# Altium PCB RockRTK.PcbDoc (part 2 of 8)
Units mm, origin at the board's own origin, x right, y up, seen from the top; angles counter-clockwise.
Board outline 128 x 72 mm, 6 copper layers (Top Layer, MidLayer1GND, MidLayer2SIG, MidLayer3PWR, MidLayer4GND, Bottom Layer), stack 1.538 mm thick; 400 components, 307 nets, 1795 pads, 1243 vias.
Unrouted connection lines stored in the file: 522.
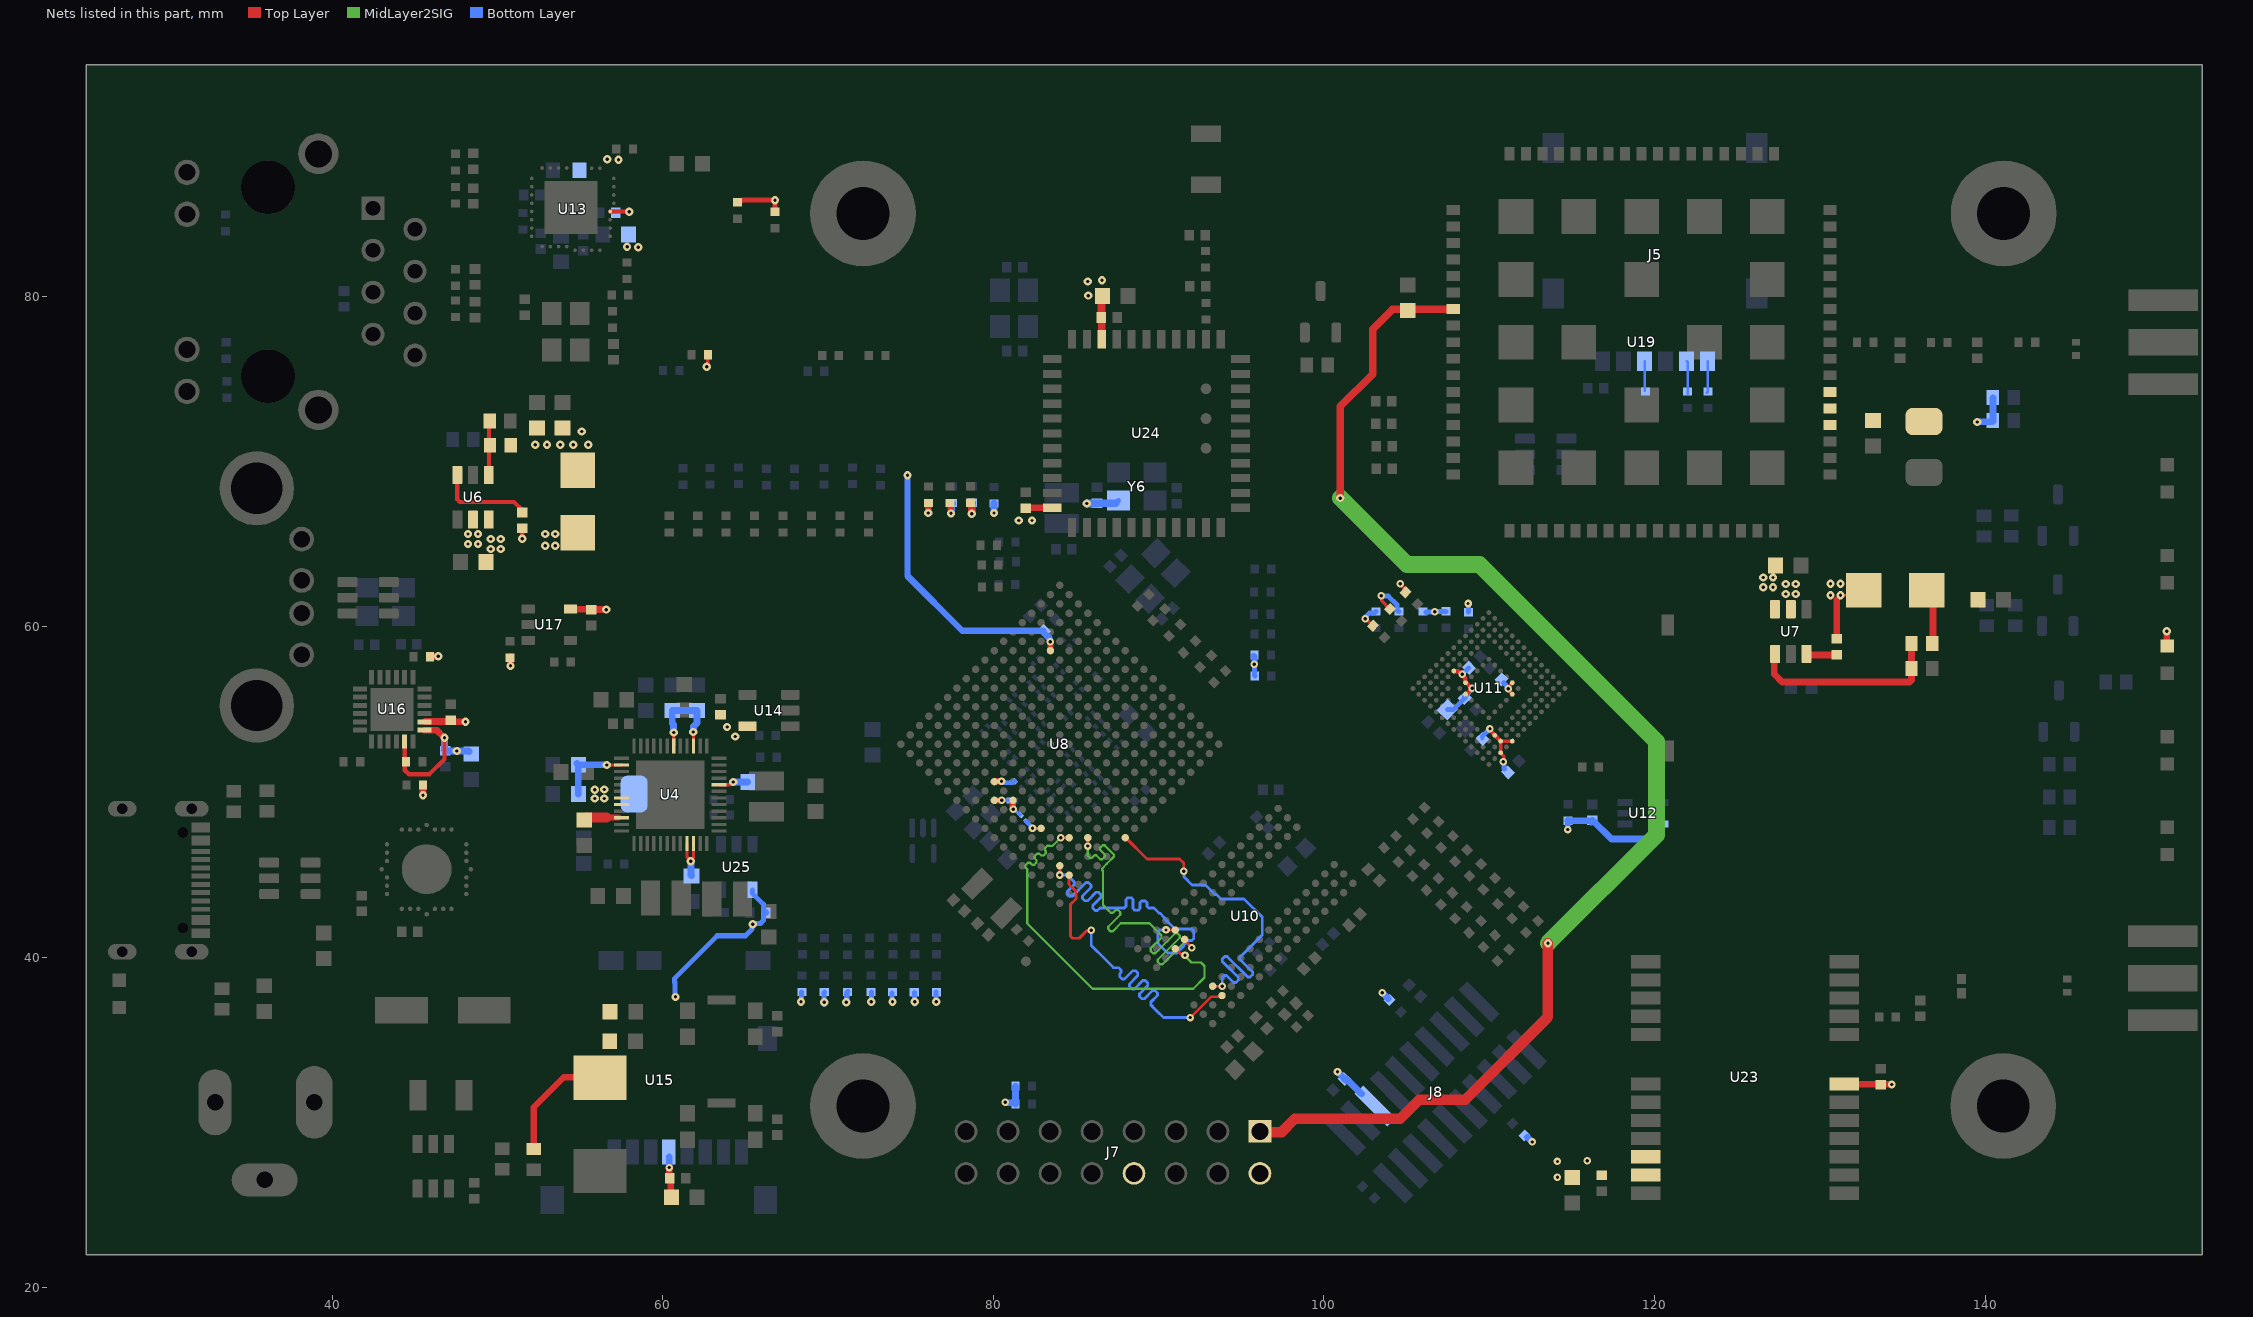
[diagram p6: the nets of this part, all layers, seen from the top]

## Footprints (in the part's own frame and the unit in brackets; to place one, negate y for a bottom-side part, rotate by r counter-clockwise, add the part's x,y. Pads: shape width x height; smd on the part's side, far side on the other; paste and mask are expansions set on the pad) (continued)
DBV0005A_L [mm] "SOT23, 5-Leads, Body 3.05x1.75mm, Pitch 0.95mm, IPC High Density"
  rrect18% 0.8x0.55 smd: 1(-1.275,0.95) 2(-1.275,0) 3(-1.275,-0.95) 4(1.275,-0.95) 5(1.275,0.95)
  silkscreen extent -1.4,-1.55 0.5,1.9, body extent -1.42,-1.46 1.42,1.46, height 1.08
DC005 [mm]
  oval 2.2x4.4 hole 1 square: 1(5.853,0.01)
  oval 2x4 hole 1 square: 2(-0.147,0.01)
  oval 4x2 hole 1 square: 3(2.853,-4.69)
  silkscreen extent -7.85,-4.49 7.6,4.51, body extent -7.9,-4.65 6.4,4.75, height 11
DSHP01TSGER [mil]
  rect 29.92x50 smd: 1(2,145) 2(2,-155)
  silkscreen extent -55,-111 59,192, body extent -48,-174 48,166, height 106
FB_0603 [mm]
  rect 0.85x0.95 smd: 1(-0.8,-0.05) 2(0.8,-0.05)
  silkscreen extent 0,-0.35 0,0.25, body extent -0.85,-0.5 0.85,0.4, height 0.9
FP-CP2102N-A02-GQFN28R-MFG [mm]
  round 0.27 smd paste+0 mask+0: 1(-2.4,1.5) 2(-2.4,1) 3(-2.4,0.5) 4(-2.725,0) 5(-2.4,-0.5) 6(-2.4,-1) 7(-2.4,-1.5) 8(-1.5,-2.4) 9(-1,-2.4) 10(-0.5,-2.4) 11(0,-2.725) 12(0.5,-2.4) 13(1,-2.4) 14(1.5,-2.4) 15(2.4,-1.5) 16(2.4,-1) 17(2.4,-0.5) 18(2.675,0) 19(2.4,0.5) 20(2.4,1) 21(2.4,1.5) 22(1.5,2.4) 23(1,2.4) 24(0.5,2.4) 25(0,2.675) 26(-0.5,2.4) 27(-1,2.4) 28(-1.5,2.4)
  round 3.015 smd paste-1000 mask+0: 29(0,0)
  Top Layer region: -1.35,2.875 -1.35,2.075 -1.361,2.018 -1.394,1.969 -1.443,1.936 -1.5,1.925 -1.5,1.925 -1.557,1.936 -1.606,1.969 -1.639,2.018 -1.65,2.075 -1.65,2.075 -1.65,2.875
  Top Layer region: -0.85,2.875 -0.85,2.075 -0.861,2.018 -0.894,1.969 -0.943,1.936 -1,1.925 -1,1.925 -1.057,1.936 -1.106,1.969 -1.139,2.018 -1.15,2.075 -1.15,2.075 -1.15,2.875
  Top Layer region: -0.35,2.875 -0.35,2.075 -0.361,2.018 -0.394,1.969 -0.443,1.936 -0.5,1.925 -0.5,1.925 -0.557,1.936 -0.606,1.969 -0.639,2.018 -0.65,2.075 -0.65,2.075 -0.65,2.875
  Top Layer region: 0.15,2.875 0.15,2.075 0.139,2.018 0.106,1.969 0.057,1.936 0,1.925 0,1.925 -0.057,1.936 -0.106,1.969 -0.139,2.018 -0.15,2.075 -0.15,2.075 -0.15,2.875
  Top Layer region: 0.65,2.875 0.65,2.075 0.639,2.018 0.606,1.969 0.557,1.936 0.5,1.925 0.5,1.925 0.443,1.936 0.394,1.969 0.361,2.018 0.35,2.075 0.35,2.075 0.35,2.875
  Top Layer region: 1.15,2.875 1.15,2.075 1.139,2.018 1.106,1.969 1.057,1.936 1,1.925 1,1.925 0.943,1.936 0.894,1.969 0.861,2.018 0.85,2.075 0.85,2.075 0.85,2.875
  Top Layer region: 1.65,2.875 1.65,2.075 1.639,2.018 1.606,1.969 1.557,1.936 1.5,1.925 1.5,1.925 1.443,1.936 1.394,1.969 1.361,2.018 1.35,2.075 1.35,2.075 1.35,2.875
  Top Layer region: 2.875,1.35 2.075,1.35 2.018,1.361 1.969,1.394 1.936,1.443 1.925,1.5 1.925,1.5 1.936,1.557 1.969,1.606 2.018,1.639 2.075,1.65 2.075,1.65 2.875,1.65
  Top Layer region: 2.875,0.85 2.075,0.85 2.018,0.861 1.969,0.894 1.936,0.943 1.925,1 1.925,1 1.936,1.057 1.969,1.106 2.018,1.139 2.075,1.15 2.075,1.15 2.875,1.15
  Top Layer region: 2.875,0.35 2.075,0.35 2.018,0.361 1.969,0.394 1.936,0.443 1.925,0.5 1.925,0.5 1.936,0.557 1.969,0.606 2.018,0.639 2.075,0.65 2.075,0.65 2.875,0.65
  Top Layer region: 2.875,-0.15 2.075,-0.15 2.018,-0.139 1.969,-0.106 1.936,-0.057 1.925,0 1.925,0 1.936,0.057 1.969,0.106 2.018,0.139 2.075,0.15 2.075,0.15 2.875,0.15
  Top Layer region: 2.875,-0.65 2.075,-0.65 2.018,-0.639 1.969,-0.606 1.936,-0.557 1.925,-0.5 1.925,-0.5 1.936,-0.443 1.969,-0.394 2.018,-0.361 2.075,-0.35 2.075,-0.35 2.875,-0.35
  Top Layer region: 2.875,-1.15 2.075,-1.15 2.018,-1.139 1.969,-1.106 1.936,-1.057 1.925,-1 1.925,-1 1.936,-0.943 1.969,-0.894 2.018,-0.861 2.075,-0.85 2.075,-0.85 2.875,-0.85
  Top Layer region: 2.875,-1.65 2.075,-1.65 2.018,-1.639 1.969,-1.606 1.936,-1.557 1.925,-1.5 1.925,-1.5 1.936,-1.443 1.969,-1.394 2.018,-1.361 2.075,-1.35 2.075,-1.35 2.875,-1.35
  Top Layer region: 1.35,-2.875 1.35,-2.075 1.361,-2.018 1.394,-1.969 1.443,-1.936 1.5,-1.925 1.5,-1.925 1.557,-1.936 1.606,-1.969 1.639,-2.018 1.65,-2.075 1.65,-2.075 1.65,-2.875
  Top Layer region: 0.85,-2.875 0.85,-2.075 0.861,-2.018 0.894,-1.969 0.943,-1.936 1,-1.925 1,-1.925 1.057,-1.936 1.106,-1.969 1.139,-2.018 1.15,-2.075 1.15,-2.075 1.15,-2.875
  Top Layer region: 0.35,-2.875 0.35,-2.075 0.361,-2.018 0.394,-1.969 0.443,-1.936 0.5,-1.925 0.5,-1.925 0.557,-1.936 0.606,-1.969 0.639,-2.018 0.65,-2.075 0.65,-2.075 0.65,-2.875
  Top Layer region: -0.15,-2.875 -0.15,-2.075 -0.139,-2.018 -0.106,-1.969 -0.057,-1.936 0,-1.925 0,-1.925 0.057,-1.936 0.106,-1.969 0.139,-2.018 0.15,-2.075 0.15,-2.075 0.15,-2.875
  Top Layer region: -0.65,-2.875 -0.65,-2.075 -0.639,-2.018 -0.606,-1.969 -0.557,-1.936 -0.5,-1.925 -0.5,-1.925 -0.443,-1.936 -0.394,-1.969 -0.361,-2.018 -0.35,-2.075 -0.35,-2.075 -0.35,-2.875
  Top Layer region: -1.15,-2.875 -1.15,-2.075 -1.139,-2.018 -1.106,-1.969 -1.057,-1.936 -1,-1.925 -1,-1.925 -0.943,-1.936 -0.894,-1.969 -0.861,-2.018 -0.85,-2.075 -0.85,-2.075 -0.85,-2.875
  Top Layer region: -1.65,-2.875 -1.65,-2.075 -1.639,-2.018 -1.606,-1.969 -1.557,-1.936 -1.5,-1.925 -1.5,-1.925 -1.443,-1.936 -1.394,-1.969 -1.361,-2.018 -1.35,-2.075 -1.35,-2.075 -1.35,-2.875
  Top Layer region: -2.875,-1.35 -2.075,-1.35 -2.018,-1.361 -1.969,-1.394 -1.936,-1.443 -1.925,-1.5 -1.925,-1.5 -1.936,-1.557 -1.969,-1.606 -2.018,-1.639 -2.075,-1.65 -2.075,-1.65 -2.875,-1.65
  Top Layer region: -2.875,-0.85 -2.075,-0.85 -2.018,-0.861 -1.969,-0.894 -1.936,-0.943 -1.925,-1 -1.925,-1 -1.936,-1.057 -1.969,-1.106 -2.018,-1.139 -2.075,-1.15 -2.075,-1.15 -2.875,-1.15
  Top Layer region: -2.875,-0.35 -2.075,-0.35 -2.018,-0.361 -1.969,-0.394 -1.936,-0.443 -1.925,-0.5 -1.925,-0.5 -1.936,-0.557 -1.969,-0.606 -2.018,-0.639 -2.075,-0.65 -2.075,-0.65 -2.875,-0.65
  Top Layer region: -2.875,0.15 -2.075,0.15 -2.018,0.139 -1.969,0.106 -1.936,0.057 -1.925,0 -1.925,0 -1.936,-0.057 -1.969,-0.106 -2.018,-0.139 -2.075,-0.15 -2.075,-0.15 -2.875,-0.15
  Top Layer region: -2.875,0.65 -2.075,0.65 -2.018,0.639 -1.969,0.606 -1.936,0.557 -1.925,0.5 -1.925,0.5 -1.936,0.443 -1.969,0.394 -2.018,0.361 -2.075,0.35 -2.075,0.35 -2.875,0.35
  Top Layer region: -2.875,1.15 -2.075,1.15 -2.018,1.139 -1.969,1.106 -1.936,1.057 -1.925,1 -1.925,1 -1.936,0.943 -1.969,0.894 -2.018,0.861 -2.075,0.85 -2.075,0.85 -2.875,0.85
  Top Layer region: -2.875,1.65 -2.075,1.65 -2.018,1.639 -1.969,1.606 -1.936,1.557 -1.925,1.5 -1.925,1.5 -1.936,1.443 -1.969,1.394 -2.018,1.361 -2.075,1.35 -2.075,1.35 -2.875,1.35
  Top Layer region: -1.325,1.675 1.675,1.675 1.675,-1.675 -1.675,-1.675 -1.675,1.325 -1.325,1.675
  silkscreen extent -3.55,-2.55 2.55,2.55, body extent -2.98,-2.98 2.98,2.98, height 0.25
FP-DBV0005A-MFG [mm]
  rrect17% 1.1x0.6 smd paste+0 mask+0: 1(-1.3,0.95) 2(-1.3,0) 3(-1.3,-0.95) 4(1.3,-0.95) 5(1.3,0.95)
  silkscreen extent -2.6,-1.53 0.87,1.52, body extent -1.95,-1.78 1.95,1.78, height 0.25
FP-DCK0005A-IPC_C [mm]
  rect 1.164x0.336 smd paste+0 mask+0: 1(-0.77,0.65)
  rrect100% 1.164x0.336 smd paste+0 mask+0: 2(-0.77,0) 3(-0.77,-0.65) 4(0.77,-0.65) 5(0.77,0.65)
  silkscreen extent -2.05,-1.25 1.05,1.25
FP-DCK0005A-MFG [mm]
  rect 0.9x0.4 smd paste-1000 mask+0: 1(-1.1,0.65) 2(-1.1,0) 3(-1.1,-0.65) 4(1.1,-0.65) 5(1.1,0.65)
  silkscreen extent -2.22,-1.07 0.7,1.08, body extent -1.1,-1 1.1,1, height 1.1
FP-DDC0006A-MFG [mm]
  rrect17% 1.1x0.6 smd paste+0 mask+0: 1(-1.35,0.95) 2(-1.35,0) 3(-1.35,-0.95) 4(1.35,-0.95) 5(1.35,0) 6(1.35,0.95)
  silkscreen extent -2.57,-1.53 0.43,1.53, body extent -2,-1.63 2,1.63, height 0.25
FP-KMR231GLFS-MFG [mm]
  rect 0.9x1 smd paste+0 mask+0: 1(-2.05,0.8) 2(2.05,0.8) 3(-2.05,-0.8) 4(2.05,-0.8)
  rect 1.7x0.55 smd paste+0 mask+0: 5(0,1.425)
  silkscreen extent -3.17,-1.4 2.1,1.68, body extent -2.6,-1.5 2.6,1.8, height 0.25
FP-LAN8710A-EZC-TR-MFG [mm]
  round 0.216 smd paste+0 mask+0: 1(-2.37,1.75) 2(-2.37,1.25) 3(-2.37,0.75) 4(-2.37,0.25) 5(-2.595,-0.25) 6(-2.595,-0.75) 7(-2.595,-1.25) 8(-2.595,-1.75) 9(-1.75,-2.37) 10(-1.25,-2.37) 11(-0.75,-2.37) 12(-0.25,-2.37) 13(0.25,-2.595) 14(0.75,-2.595) 15(1.25,-2.595) 16(1.75,-2.595) 17(2.37,-1.75) 18(2.37,-1.25) 19(2.37,-0.75) 20(2.37,-0.25) 21(2.382,0.25) 22(2.382,0.75) 23(2.382,1.25) 24(2.382,1.75) 25(1.75,2.37) 26(1.25,2.37) 27(0.75,2.37) 28(0.25,2.37) 29(-0.25,2.382) 30(-0.75,2.382) 31(-1.25,2.382) 32(-1.75,2.382)
  rect 3.2x3.2 smd paste+0 mask+0: 33(0,0)
  Top Layer region: -1.63,2.715 -1.63,2.145 -1.639,2.099 -1.665,2.06 -1.704,2.034 -1.75,2.025 -1.75,2.025 -1.796,2.034 -1.835,2.06 -1.861,2.099 -1.87,2.145 -1.87,2.145 -1.87,2.715
  Top Layer region: -1.13,2.715 -1.13,2.145 -1.139,2.099 -1.165,2.06 -1.204,2.034 -1.25,2.025 -1.25,2.025 -1.296,2.034 -1.335,2.06 -1.361,2.099 -1.37,2.145 -1.37,2.145 -1.37,2.715
  Top Layer region: -0.63,2.715 -0.63,2.145 -0.639,2.099 -0.665,2.06 -0.704,2.034 -0.75,2.025 -0.75,2.025 -0.796,2.034 -0.835,2.06 -0.861,2.099 -0.87,2.145 -0.87,2.145 -0.87,2.715
  Top Layer region: -0.13,2.715 -0.13,2.145 -0.139,2.099 -0.165,2.06 -0.204,2.034 -0.25,2.025 -0.25,2.025 -0.296,2.034 -0.335,2.06 -0.361,2.099 -0.37,2.145 -0.37,2.145 -0.37,2.715
  Top Layer region: 0.37,2.715 0.37,2.145 0.361,2.099 0.335,2.06 0.296,2.034 0.25,2.025 0.25,2.025 0.204,2.034 0.165,2.06 0.139,2.099 0.13,2.145 0.13,2.145 0.13,2.715
  Top Layer region: 0.87,2.715 0.87,2.145 0.861,2.099 0.835,2.06 0.796,2.034 0.75,2.025 0.75,2.025 0.704,2.034 0.665,2.06 0.639,2.099 0.63,2.145 0.63,2.145 0.63,2.715
  Top Layer region: 1.37,2.715 1.37,2.145 1.361,2.099 1.335,2.06 1.296,2.034 1.25,2.025 1.25,2.025 1.204,2.034 1.165,2.06 1.139,2.099 1.13,2.145 1.13,2.145 1.13,2.715
  Top Layer region: 1.87,2.715 1.87,2.145 1.861,2.099 1.835,2.06 1.796,2.034 1.75,2.025 1.75,2.025 1.704,2.034 1.665,2.06 1.639,2.099 1.63,2.145 1.63,2.145 1.63,2.715
  Top Layer region: 2.715,1.63 2.145,1.63 2.099,1.639 2.06,1.665 2.034,1.704 2.025,1.75 2.025,1.75 2.034,1.796 2.06,1.835 2.099,1.861 2.145,1.87 2.145,1.87 2.715,1.87
  Top Layer region: 2.715,1.13 2.145,1.13 2.099,1.139 2.06,1.165 2.034,1.204 2.025,1.25 2.025,1.25 2.034,1.296 2.06,1.335 2.099,1.361 2.145,1.37 2.145,1.37 2.715,1.37
  Top Layer region: 2.715,0.63 2.145,0.63 2.099,0.639 2.06,0.665 2.034,0.704 2.025,0.75 2.025,0.75 2.034,0.796 2.06,0.835 2.099,0.861 2.145,0.87 2.145,0.87 2.715,0.87
  Top Layer region: 2.715,0.13 2.145,0.13 2.099,0.139 2.06,0.165 2.034,0.204 2.025,0.25 2.025,0.25 2.034,0.296 2.06,0.335 2.099,0.361 2.145,0.37 2.145,0.37 2.715,0.37
  Top Layer region: 2.715,-0.37 2.145,-0.37 2.099,-0.361 2.06,-0.335 2.034,-0.296 2.025,-0.25 2.025,-0.25 2.034,-0.204 2.06,-0.165 2.099,-0.139 2.145,-0.13 2.145,-0.13 2.715,-0.13
  Top Layer region: 2.715,-0.87 2.145,-0.87 2.099,-0.861 2.06,-0.835 2.034,-0.796 2.025,-0.75 2.025,-0.75 2.034,-0.704 2.06,-0.665 2.099,-0.639 2.145,-0.63 2.145,-0.63 2.715,-0.63
  Top Layer region: 2.715,-1.37 2.145,-1.37 2.099,-1.361 2.06,-1.335 2.034,-1.296 2.025,-1.25 2.025,-1.25 2.034,-1.204 2.06,-1.165 2.099,-1.139 2.145,-1.13 2.145,-1.13 2.715,-1.13
  Top Layer region: 2.715,-1.87 2.145,-1.87 2.099,-1.861 2.06,-1.835 2.034,-1.796 2.025,-1.75 2.025,-1.75 2.034,-1.704 2.06,-1.665 2.099,-1.639 2.145,-1.63 2.145,-1.63 2.715,-1.63
  Top Layer region: 1.63,-2.715 1.63,-2.145 1.639,-2.099 1.665,-2.06 1.704,-2.034 1.75,-2.025 1.75,-2.025 1.796,-2.034 1.835,-2.06 1.861,-2.099 1.87,-2.145 1.87,-2.145 1.87,-2.715
  Top Layer region: 1.13,-2.715 1.13,-2.145 1.139,-2.099 1.165,-2.06 1.204,-2.034 1.25,-2.025 1.25,-2.025 1.296,-2.034 1.335,-2.06 1.361,-2.099 1.37,-2.145 1.37,-2.145 1.37,-2.715
  Top Layer region: 0.63,-2.715 0.63,-2.145 0.639,-2.099 0.665,-2.06 0.704,-2.034 0.75,-2.025 0.75,-2.025 0.796,-2.034 0.835,-2.06 0.861,-2.099 0.87,-2.145 0.87,-2.145 0.87,-2.715
  Top Layer region: 0.13,-2.715 0.13,-2.145 0.139,-2.099 0.165,-2.06 0.204,-2.034 0.25,-2.025 0.25,-2.025 0.296,-2.034 0.335,-2.06 0.361,-2.099 0.37,-2.145 0.37,-2.145 0.37,-2.715
  Top Layer region: -0.37,-2.715 -0.37,-2.145 -0.361,-2.099 -0.335,-2.06 -0.296,-2.034 -0.25,-2.025 -0.25,-2.025 -0.204,-2.034 -0.165,-2.06 -0.139,-2.099 -0.13,-2.145 -0.13,-2.145 -0.13,-2.715
  Top Layer region: -0.87,-2.715 -0.87,-2.145 -0.861,-2.099 -0.835,-2.06 -0.796,-2.034 -0.75,-2.025 -0.75,-2.025 -0.704,-2.034 -0.665,-2.06 -0.639,-2.099 -0.63,-2.145 -0.63,-2.145 -0.63,-2.715
  Top Layer region: -1.37,-2.715 -1.37,-2.145 -1.361,-2.099 -1.335,-2.06 -1.296,-2.034 -1.25,-2.025 -1.25,-2.025 -1.204,-2.034 -1.165,-2.06 -1.139,-2.099 -1.13,-2.145 -1.13,-2.145 -1.13,-2.715
  Top Layer region: -1.87,-2.715 -1.87,-2.145 -1.861,-2.099 -1.835,-2.06 -1.796,-2.034 -1.75,-2.025 -1.75,-2.025 -1.704,-2.034 -1.665,-2.06 -1.639,-2.099 -1.63,-2.145 -1.63,-2.145 -1.63,-2.715
  Top Layer region: -2.715,-1.63 -2.145,-1.63 -2.099,-1.639 -2.06,-1.665 -2.034,-1.704 -2.025,-1.75 -2.025,-1.75 -2.034,-1.796 -2.06,-1.835 -2.099,-1.861 -2.145,-1.87 -2.145,-1.87 -2.715,-1.87
  Top Layer region: -2.715,-1.13 -2.145,-1.13 -2.099,-1.139 -2.06,-1.165 -2.034,-1.204 -2.025,-1.25 -2.025,-1.25 -2.034,-1.296 -2.06,-1.335 -2.099,-1.361 -2.145,-1.37 -2.145,-1.37 -2.715,-1.37
  Top Layer region: -2.715,-0.63 -2.145,-0.63 -2.099,-0.639 -2.06,-0.665 -2.034,-0.704 -2.025,-0.75 -2.025,-0.75 -2.034,-0.796 -2.06,-0.835 -2.099,-0.861 -2.145,-0.87 -2.145,-0.87 -2.715,-0.87
  Top Layer region: -2.715,-0.13 -2.145,-0.13 -2.099,-0.139 -2.06,-0.165 -2.034,-0.204 -2.025,-0.25 -2.025,-0.25 -2.034,-0.296 -2.06,-0.335 -2.099,-0.361 -2.145,-0.37 -2.145,-0.37 -2.715,-0.37
  Top Layer region: -2.715,0.37 -2.145,0.37 -2.099,0.361 -2.06,0.335 -2.034,0.296 -2.025,0.25 -2.025,0.25 -2.034,0.204 -2.06,0.165 -2.099,0.139 -2.145,0.13 -2.145,0.13 -2.715,0.13
  Top Layer region: -2.715,0.87 -2.145,0.87 -2.099,0.861 -2.06,0.835 -2.034,0.796 -2.025,0.75 -2.025,0.75 -2.034,0.704 -2.06,0.665 -2.099,0.639 -2.145,0.63 -2.145,0.63 -2.715,0.63
  Top Layer region: -2.715,1.37 -2.145,1.37 -2.099,1.361 -2.06,1.335 -2.034,1.296 -2.025,1.25 -2.025,1.25 -2.034,1.204 -2.06,1.165 -2.099,1.139 -2.145,1.13 -2.145,1.13 -2.715,1.13
  Top Layer region: -2.715,1.87 -2.145,1.87 -2.099,1.861 -2.06,1.835 -2.034,1.796 -2.025,1.75 -2.025,1.75 -2.034,1.704 -2.06,1.665 -2.099,1.639 -2.145,1.63 -2.145,1.63 -2.715,1.63
  silkscreen extent -3.42,-2.55 2.55,2.55, body extent -2.82,-2.82 2.82,2.82, height 0.25
FP-LQG15HH_02-IPC_B [mm]
  rect 0.615x0.572 smd paste+0 mask+0: 1(-0.429,0) 2(0.429,0)
  silkscreen extent -1.51,-0.69 0.74,0.69, body extent -0.89,-0.44 0.89,0.44, height 0.25
FP-LQM2HPN_G0-IPC_C [mm]
  rect 1.155x2.106 smd paste+0 mask+0: 1(-0.926,0) 2(0.926,0)
  silkscreen extent -1.5,-1.5 1.5,1.5, body extent -1.6,-1.2 1.6,1.2, height 0.25
FP-LXES15-MFG [mm]
  rect 0.4x0.5 smd paste+0 mask+0: 1(-0.4,0) 2(0.4,0)
  silkscreen extent -0.53,-0.65 0.53,0.65, body extent -0.7,-0.38 0.7,0.38, height 0.25
FTSH-110-01-L-DV-K-A [mm]
  rect 0.74x2.79 smd: 01(-5.683,-2.172) 02(-5.683,1.898) 03(-4.413,-2.172) 04(-4.413,1.898) 05(-3.143,-2.172) 06(-3.143,1.898) 07(-1.873,-2.172) 08(-1.873,1.898) 09(-0.603,-2.172) 10(-0.603,1.898) 11(0.667,-2.172) 12(0.667,1.898) 13(1.937,-2.172) 14(1.937,1.898) 15(3.207,-2.172) 16(3.207,1.898) 17(4.477,-2.172) 18(4.477,1.898) 19(5.747,-2.172) 20(5.747,1.898)
  silkscreen extent -7.01,-2.44 6.47,1.58, body extent -6.35,-3.06 6.35,2.78, height 5.71
FXL0420 [mm] "SMD,4.2x4.4mm Power Inductors ROHS"
  rect 2.15x2.1 smd: 1(-1.9,0) 2(1.9,0)
  silkscreen extent -2.4,-2.2 2.4,2.2, body extent -2.4,-1.98 2.4,2.22, height 1.3
FXL0630 [mm]
  rect 2.67x3.21 smd: 1(-2.808,0.205) 2(2.832,0.205)
  silkscreen extent -3.49,-3.1 3.51,3.51, body extent -3.71,-3.1 3.73,3.51, height 2.8
GT-USB-7010ASV [mm] "USB 2.0 3A 1 Horizontal attachment 16P Female -40℃~+85℃ Type-C SMD USB Connectors ROHS"
  rect 0.6x1.14 smd mask+0.05: A1/B12(-2.977,3.684) A4/B9(-2.177,3.684) B1/A12(3.423,3.684) B4/A9(2.623,3.684)
  rect 0.3x1.14 smd mask+0.05: A5(-1.027,3.684) A6(-0.027,3.684) A7(0.473,3.684) A8(1.473,3.684) B5(1.973,3.684) B6(0.973,3.684) B7(-0.527,3.684) B8(-1.527,3.684)
  oval 0.95x2.05 hole 0.65 slot 1.776 at 90 deg: SH1(-4.102,3.134) SH2(4.548,3.134)
  oval 0.95x1.75 hole 0.65 slot 1.475 at 90 deg: SH3(-4.102,-1.066) SH4(4.548,-1.066)
  round 0.65 hole 0.65 unplated: ""(-2.667,2.614) ""(3.113,2.614)
  silkscreen extent -4.25,-3.18 4.69,5.03, body extent -4.25,-3.91 4.69,3.74, height 3.26
header_2.54_16pin_2row [mm]
  rect 1.37x1.37 / inner round 1.37 / far side rect 1.37x1.37 hole 1.02: 01(-9.04,-1.25)
  round 1.37 hole 1.02: 02(-9.04,1.29) 03(-6.5,-1.25) 04(-6.5,1.29) 05(-3.96,-1.25) 06(-3.96,1.29) 07(-1.42,-1.25) 08(-1.42,1.29) 09(1.12,-1.25) 10(1.12,1.29) 11(3.66,-1.25) 12(3.66,1.29) 13(6.2,-1.25) 14(6.2,1.29) 15(8.74,-1.25) 16(8.74,1.29)
  silkscreen extent -11.06,-2.49 10.01,2.53, body extent -10.41,-2.51 9.91,2.51, height 8.38
HR911105A [mm]
  rect 1.398x1.398 / inner round 1.398 / far side rect 1.398x1.398 hole 0.89: 1(4.203,-7.179)
  round 1.398 hole 0.89: 2(2.933,-9.719) 3(1.663,-7.179) 4(0.393,-9.719) 5(-0.877,-7.179) 6(-2.147,-9.719) 7(-3.417,-7.179) 8(-4.687,-9.719)
  round 1.53 hole 1.02: 9(6.378,4.071) 10(3.838,4.071) 11(-4.332,4.071) 12(-6.872,4.071)
  round 2.445 hole 1.63: 15(7.498,-3.879) 16(-7.992,-3.879)
  round 3.25 hole 3.25 unplated: ""(-5.962,-0.829) ""(5.468,-0.829)
  silkscreen extent -8.25,-11.31 8.9,10.09, body extent -8.27,-11.21 7.77,10.09, height 13.5
LED_0603 [mm]
  rect 0.8x0.8 smd: 1(0.838,0) 2(-0.812,0)
  silkscreen extent -1.6,-0.85 -1.4,-0.65, body extent -0.79,-0.4 0.81,0.4, height 0.7
MOLEX_502570-0893 [mm]
  rect 0.8x1.5 smd: 1(-2.684,3.828) 2(-1.584,3.828) 3(-0.484,3.828) 4(0.616,3.828) 5(1.716,3.828) 6(2.816,3.828) 7(3.916,3.828) 8(5.016,3.828)
  rect 1.15x1.5 smd: DL(6.591,-3.022)
  rect 1.5x1.15 smd: DS(-0.584,-7.747) SM3(-2.884,-7.747) SM4(6.016,-7.747)
  rect 1.4x1.7 smd: SM1(-6.434,6.728) SM2(6.466,6.728)
  silkscreen extent -7.06,-8.52 7.14,7.8, body extent -7.05,-8.45 6.75,7.05, height 1.95
NEO-F9P [mm]
  rect 1.8x0.8 smd paste-2: 1(6.226,-5.999) 2(6.226,-4.899) 3(6.226,-3.799) 4(6.226,-2.699) 5(6.226,-1.599) 6(6.226,-0.499) 7(6.226,0.601) 8(6.226,3.601) 9(6.226,4.701) 10(6.226,5.801) 11(6.226,6.901) 12(6.226,8.001) 13(-5.774,8.001) 14(-5.774,6.901) 15(-5.774,5.801) 16(-5.774,4.701) 17(-5.774,3.601) 18(-5.774,0.601) 19(-5.774,-0.499) 20(-5.774,-1.599) 21(-5.774,-2.699) 22(-5.774,-3.799) 23(-5.774,-4.899) 24(-5.774,-5.999)
  silkscreen extent -5.87,-7 8.22,9, body extent -5.87,-7 6.33,9, height 2.6
PMNH_3.2MM [mm]
  round 6.4 hole 3.2: 1(0,0)
QFN40P600X600X100-49N-D [mm]
  rect 0.9x0.2 smd: 1(-2.955,2.259) 2(-2.955,1.859) 3(-2.955,1.459) 4(-2.955,1.059) 5(-2.955,0.659) 6(-2.955,0.259) 7(-2.955,-0.141) 8(-2.955,-0.541) 9(-2.955,-0.941) 10(-2.955,-1.341) 11(-2.955,-1.741) 12(-2.955,-2.141) 25(2.945,-2.141) 26(2.945,-1.741) 27(2.945,-1.341) 28(2.945,-0.941) 29(2.945,-0.541) 30(2.945,-0.141) 31(2.945,0.259) 32(2.945,0.659) 33(2.945,1.059) 34(2.945,1.459) 35(2.945,1.859) 36(2.945,2.259)
  rect 0.2x0.9 smd: 13(-2.205,-2.891) 14(-1.805,-2.891) 15(-1.405,-2.891) 16(-1.005,-2.891) 17(-0.605,-2.891) 18(-0.205,-2.891) 19(0.195,-2.891) 20(0.595,-2.891) 21(0.995,-2.891) 22(1.395,-2.891) 23(1.795,-2.891) 24(2.195,-2.891) 37(2.195,3.009) 38(1.795,3.009) 39(1.395,3.009) 40(0.995,3.009) 41(0.595,3.009) 42(0.195,3.009) 43(-0.205,3.009) 44(-0.605,3.009) 45(-1.005,3.009) 46(-1.405,3.009) 47(-1.805,3.009) 48(-2.205,3.009)
  rect 4.15x4.15 smd: 49(-0.005,0.059)
  silkscreen extent -3.5,2.76 -3.3,2.96, body extent -3.05,-2.99 3.05,3.11, height 1
QFN50P400X400X80-25N-D [mm]
  rect 0.85x0.3 smd: 1(-1.963,1.365) 2(-1.963,0.865) 3(-1.963,0.365) 4(-1.963,-0.135) 5(-1.963,-0.635) 6(-1.963,-1.135) 13(1.937,-1.135) 14(1.937,-0.635) 15(1.937,-0.135) 16(1.937,0.365) 17(1.937,0.865) 18(1.937,1.365)
  rect 0.3x0.85 smd: 7(-1.263,-1.835) 8(-0.763,-1.835) 9(-0.263,-1.835) 10(0.237,-1.835) 11(0.737,-1.835) 12(1.237,-1.835) 19(1.237,2.065) 20(0.737,2.065) 21(0.237,2.065) 22(-0.263,2.065) 23(-0.763,2.065) 24(-1.263,2.065)
  rect 2.6x2.6 smd: 25(-0.013,0.115)
  silkscreen extent -2.51,1.99 -2.26,2.24, body extent -2.06,-1.93 2.04,2.17, height 0.8
R_0402 [mm]
  rect 0.5x0.55 smd: 1(-0.5,0) 2(0.5,0)
  body extent -0.53,-0.28 0.53,0.28, height 0.37
R_0603 [mm]
  rect 0.75x0.9 smd: 1(-0.625,0) 2(0.625,0)
  body extent -0.8,-0.43 0.8,0.42, height 0.55
SIM8060-6-1-14-00-A [mm]
  rect 0.9x1.2 smd: C1(-3.087,6.743) C2(-0.547,6.743) C3(1.993,6.743) C5(-1.817,6.743) C6(0.723,6.743) C7(3.263,6.743)
  rect 1.3x1.8 smd: S1(-6.062,2.643) S2(6.238,2.643) S3(6.238,-6.157) SW(-6.062,-6.157)
  Keep-Out Layer region: 3.278,-6.357 1.978,-6.357 1.978,-2.657 3.278,-2.657
  Keep-Out Layer region: 0.738,-6.357 -0.562,-6.357 -0.562,-2.657 0.738,-2.657
  Keep-Out Layer region: -1.402,-6.357 -3.842,-6.357 -3.842,-2.657 -1.402,-2.657
  Keep-Out Layer region: 3.278,0.663 1.978,0.663 1.978,4.363 3.278,4.363
  Keep-Out Layer region: 0.738,0.663 -0.562,0.663 -0.562,4.363 0.738,4.363
  Keep-Out Layer region: -1.972,0.663 -3.272,0.663 -3.272,4.363 -1.972,4.363
  Keep-Out Layer region: 3.278,-6.357 1.978,-6.357 1.978,-2.657 3.278,-2.657
  Keep-Out Layer region: 0.738,-6.357 -0.562,-6.357 -0.562,-2.657 0.738,-2.657
  Keep-Out Layer region: -1.402,-6.357 -3.842,-6.357 -3.842,-2.657 -1.402,-2.657
  Keep-Out Layer region: 3.278,0.663 1.978,0.663 1.978,4.363 3.278,4.363
  Keep-Out Layer region: 0.738,0.663 -0.562,0.663 -0.562,4.363 0.738,4.363
  Keep-Out Layer region: -1.972,0.663 -3.272,0.663 -3.272,4.363 -1.972,4.363
  silkscreen extent -5.51,-7.06 5.69,7.71, body extent -6.16,-7.05 6.24,7.05, height 1.4
SOT-23-3 [mm]
  rrect50% 1.21x0.59 smd: 1(-1.287,0.997) 2(-1.287,-0.903) 3(1.223,0.047)
  silkscreen extent -2.53,-1.51 0.87,1.61, body extent -1.4,-1.4 1.4,1.5, height 1.25
SOT-23-5 [mm] "SOT23, 5-Leads, Body 2,90x2,80mm, Pitch 0,95mm, IPC Medium Density"
  rect 1x0.6 smd: 1(-1.375,0.95) 2(-1.375,0) 3(-1.375,-0.95) 4(1.375,-0.95) 5(1.375,0.95)
  silkscreen extent -1.5,-1.55 0.5,1.92, body extent -0.88,-1.52 0.88,1.53, height 1.45
SOT-23-6 [mm]
  rrect25% 1.21x0.59 smd: 1(-1.251,0.925) 2(-1.251,-0.025) 3(-1.251,-0.975) 4(1.259,-0.975) 5(1.259,-0.025) 6(1.259,0.925)
  silkscreen extent -2.65,-1.59 0.82,1.54, body extent -1.4,-1.49 1.4,1.44, height 1.4
TP06R [mm] "Testpoint, round, d=0.6mm"
  round 0.6 smd far side paste-1: 1(0,0)
TYPE-A_W14xD14.45xH7 [mm]
  round 1.5 hole 1: 1(0.012,0.031) 2(2.512,0.031) 3(4.512,0.031) 4(7.012,0.031)
  round 4.5 hole 3.1: 5(-3.058,-2.679) 6(10.082,-2.679)
  silkscreen extent -2.8,-12.96 9.81,1.04, body extent -4.62,-12.96 11.61,1.04, height 7.72

## Part data
ANT1: "5.05dBi Chip Antenna Linear 160MHz 2450MHz 1W 1206 Antennas ROHS", Manufacturer=YAGEO, ComponentLink1Description="Datasheet Link", ComponentLink1URL=https://www.lcsc.com/datasheet/lcsc_datasheet_2410121536_YAGEO-ANT3216LL00R2400A_C293767.pdf, Manufacturer Part Number=ANT3216LL00R2400A
C1 C5 C7 C8 C10 C11 C12 C13 C14 C15 C16 C17 C18 C19 C20 C21 C22 C26 C27 C29 C30 C31 C33 C34 C39 C40 C50 C51 C70 C91 C102 C110 C113 C117 C127 C129 C131 C136 C139 C148 C152: library part C_0603, "Capacitor 0603 SMD"
C2 C3 C9 C23 C24 C28 C32 C86 C87 C88 C89 C90 C92 C93 C94 C95 C96 C97 C98 C99 C100 C101 C103 C104 C105 C106 C107 C108 C109 C111 C112 C114 C115 C116 C118 C119 C120 C121 C122 C123 C124 C125 C126 C128 C130 C132 C133 C134 C135 C137 C138 C141 C142 C143 C144 C145 C146 C147 C149 C150 C151 C153 C154 C155 C156 C157 C158 C159 C160 C162 C163 C164 C165: library part C_0402, "Capacitor 0402 SMD"
C4: library part RVT1H101M0607, "100uF 50V 229mA@120Hz ±20% SMD,D6.3xL7.7mm Aluminum Electrolytic Capacitors - SMD ROHS", Datasheet Link=https://www.lcsc.com/datasheet/lcsc_datasheet_2410121458_ROQANG-RVT1H101M0607_C3151829.pdf, Manudacturer=ROQANG, Manufacturer Part Number=RVT1H101M0607
C6 C140: library part C_CASE-B-3528-21, "Tantalum capacitor CASE-B-3528-21"
C25: library part C_1206, "Capacitor 1206 SMD"
C35 C36 C37 C38 C41 C42 C43 C44 C45 C46 C47 C48 C49 C52 C53 C54 C55 C56 C57 C58 C59 C60 C61 C62 C63 C64 C65 C66 C67 C68 C69 C71 C72 C73 C74 C75 C76 C77 C78 C79 C80 C81 C82 C83 C84 C85 C161: library part C_0201, "Capacitor 0201 SMD"
D1 D3: library part CMP-06195-000025-1, "TVS DIODE 4V 1005", Case Code (Imperial)=0402, Case Code (Metric)=1005, Max Operating Temperature=85°C, Min Operating Temperature=-40°C, Power Line Protection=No, Resistor Type=Zener, Reverse Standoff Voltage=4V, Case/Package=0402, Mount="Surface Mount", Number of Bidirectional Channels=1, Packaging="Tape and Reel"
D2: "11.4V Clamp 7A (8/20µs) Ipp Tvs Diode Surface Mount SOT-23-6", Manufacturer=STMicroelectronics, ComponentLink1Description="Datasheet Link", ComponentLink1URL=https://www.st.com/resource/en/datasheet/esda6v1-5sc6.pdf, Manufacturer Part Number=ESDA6V1-5SC6
FB1: library part FB_0603, "Ferrite Beads 0603 SMD"
J1: "Bend-in DC Power Receptacle -20℃~+70℃ 2mm 6.3mm 5A 24V Plugin DC Power Connectors ROHS"
J2: "RJ45Receptacle 1 WithLED Plugin Ethernet Connectors / Modular Connectors (RJ45 RJ11) ROHS", Manufaacturer="HANRUN(Zhongshan HanRun Elec)", ComponentLink1Description="Datasheet Link", ComponentLink1URL=https://www.lcsc.com/datasheet/lcsc_datasheet_2409302333_HANRUN-Zhongshan-HanRun-Elec-HR911105A_C12074.pdf, Manufacturer Part Number=HR911105A
J3: "Type-A 1.5A USB 2.0 1 Bend-in 4P Female -20℃~+70℃  Plugin USB Connectors ROHS", Manufacturer=XUNPU, Datasheet Link=https://www.lcsc.com/datasheet/lcsc_datasheet_2409302332_XUNPU-USB-231-ARY_C720525.pdf, Manufacturer Part Number=USB-231-ARY
J4 J6: "1 Inner Hole SMA Board-End Staggered pins 50Ω 5.2mm SMD Coaxial Connectors (RF) ROHS", Manufacturer="BAT WIRELESS", Datasheet Link=https://www.lcsc.com/datasheet/lcsc_datasheet_2410121647_BAT-WIRELESS-BWSMA-KE-P001_C496550.pdf, Manufacturer Part Number=BWSMA-KE-P001
J5: "6 Position Card Connector NANO SIM Surface Mount, Right Angle Gold", Manufacturer="Global Connector Technology", ComponentLink1Description="Datasheet Link", ComponentLink1URL=https://www.tme.eu/Document/cb0a1a43149419081a289087b1ef4c50/SIM8060-6-0-14-00A.pdf, Manufacturer Part Number=SIM8060-6-1-14-00-A
J8: "Connector Header Surface Mount 20 position 0.050\" (1.27mm)"
L1 L2 L3 L8: library part CMP-1662-00028-2, "Multilayer Type Inductor for Power Lines, 1008 (2520), 2.2μH, 20%, 0.1Ω, 1.3A", Case Code (Imperial)=1008, Case Code (Metric)=2520, Current Rating=1.3A, DC Resistance (DCR)=100mR, Inductance=2.2uH, Inductance Tolerance=20%, Max Operating Temperature=125°C, Min Operating Temperature=-55°C, Package Quantity=3000, Self Resonant Frequency=40MHz, Test Frequency=1MHz, Case/Package=1008, Core Material=Ferrite, DC Current=1.3A, Depth=2.2mm, Height=1.2mm, Height - Seated (Max)=0.039inch, Lead Free="Lead Free", Length=2.5mm, Max DC Current=1.3A, Military Standard=Not, Mount="Surface Mount", Packaging="Tape and Reel", Radiation Hardening=No, REACH SVHC="No SVHC", Series=LQM2HP_G0, Shielding=Shielded, Termination=SMD/SMT, Tolerance=20%, Width=2mm
L4: "4.5A 10uH Winding Inductor ±20% 5.5A SMD,6.6x7mm Power Inductors ROHS", Manufacturer=cjiang, Manufacturer Part Number=FXL0630-150-M, Datasheet Link=https://www.lcsc.com/datasheet/lcsc_datasheet_2404260921_cjiang--Changjiang-Microelectronics-Tech-FXL0630-150-M_C177243.pdf
L5 L6: "2.8A 4.7uH Winding Inductor ±20% 3A SMD,4.2x4.4mm Power Inductors ROHS", Manufacturer="cjiang (Changjiang Microelectronics Tech)", Mfr. Part=FXL0420-100-M, Datasheet=https://www.lcsc.com/datasheet/lcsc_datasheet_2404260921_cjiang--Changjiang-Microelectronics-Tech-FXL0420-100-M_C177242.pdf
L7: library part CMP-06042-015783-1, "Multilayer type RF Inductor 47nH ±5% 0.72Ω 300mA 0402", Case Code (Imperial)=0402, Case Code (Metric)=1005, Current Rating=200mA, DC Resistance (DCR)=720mR, Inductance=47nH, Max Operating Temperature=125°C, Min Operating Temperature=-55°C, Package Quantity=1, Self Resonant Frequency=1GHz, Test Frequency=100MHz, Tolerance=5%, Case/Package=0402, Core Material=Air, DC Current=200mA, Depth=0.55mm, Height=0.5mm, Height - Seated (Max)=0.022inch, Lead Free="Lead Free", Length=1mm, Max DC Current=200mA, Military Standard=Not, Mount="Surface Mount", Packaging="Tape and Reel", Q Factor=8, Radiation Hardening=No, Rated Current-Max=200mA, Series=LQG15HS, Shielding=Unshielded, Termination=SMD/SMT, Width=0.02inch
R1 R2 R3 R4 R5 R6 R7 R8 R9 R10 R11 R98 R99 R100 R101 R102 R103 R104 R109 R110 R164 R165: library part R_0603, "Resistor 0603 SMD"
R12 R13 R14 R15 R16 R17 R18 R19 R20 R21 R22 R23 R24 R25 R26 R27 R28 R29 R30 R31 R32 R33 R34 R35 R36 R37 R38 R39 R40 R41 R42 R43 R44 R45 R46 R47 R48 R49 R50 R51 R52 R53 R54 R55 R56 R57 R58 R59 R60 R61 R62 R63 R64 R65 R66 R67 R68 R69 R70 R71 R72 R73 R74 R75 R76 R77 R78 R79 R80 R81 R82 R83 R84 R85 R86 R87 R88 R89 R90 R91 R92 R93 R94 R95 R96 R97 R105 R106 R107 R108 R111 R112 R113 R114 R115 R116 R117 R118 R119 R120 R121 R122 R123 R124 R125 R126 R127 R128 R129 R130 R131 R132 R133 R134 R135 R136 R137 R138 R139 R140 R141 R142 R143 R144 R145 R146 R147 R148 R149 R150 R151 R152 R153 R154 R155 R156 R157 R158 R159 R160 R161 R162 R163 R166 R167 R168: library part R_0402, "Resistor 0402 SMD"
SW1 SW2: library part CMP-2000-06516-3, "SWITCH TACTILE SPST-NO 0.05A 32V", Case/Package=SMD/SMT, Contact Current Rating=50mA, Contact Resistance=100mR, Insulation Resistance=1GR, Max Operating Temperature=85°C, Max Voltage Rating (DC)=32V, Min Operating Temperature=-40°C, Operating Force=3N, Package Quantity=7000, Power Rating=1W, Actuator Length=0.5mm, Actuator Type=Standard, Contact Material=Silver, Contact Plating=Silver, Current Rating=50mA, Depth=4.6mm, Illumination Type=Non-Illuminated, Lead Free="Lead Free", Length=4.6mm, Max Current Rating=50mA, Mechanical Life=150000Cycles, Mount="Surface Mount", Orientation=Straight, Packaging="Cut Tape", Radiation Hardening=No, REACH SVHC="No SVHC", Series=KMR2, Switch Function=Off-Mom, Switch Travel=0.25mm, Termination="Gull Wing", Throw Configuration=SPST, Voltage Rating (DC)=32V, Width=2.8mm
SW3: "1 Digit SPST 24V Black 25mA 3000 Times SMD,2.9x5.4mm DIP Switches ROHS", Manufacturer=kangshen, ComponentLink1Description="Datasheet Link", ComponentLink1URL=https://www.lcsc.com/datasheet/lcsc_datasheet_2411220122_kangshen-DSHP01TSGER_C3293141.pdf, Manufacturer Part Number=DSHP01TSGER
TP1: library part CMP-00028-00002-2, "0.6mm round", Pins=1
U1: library part CMP-08093-000007-1, "IC USB TO UART BRIDGE QFN28"
U2: "USB 2.0 3A 1 Horizontal attachment 16P Female -40℃~+85℃ Type-C SMD USB Connectors ROHS", Manufacturer=G-Switch, ComponentLink1Description="Datasheet Link", ComponentLink1URL=https://www.lcsc.com/datasheet/lcsc_datasheet_2411221125_G-Switch-GT-USB-7010ASV_C2988369.pdf, Manufacturer Part Number=GT-USB-7010ASV
U3 U18: "6A 12V 150W 6V Unidirectional 5V SOT-23-6 ESD and Surge Protection (TVS/ESD) ROHS", Manufacturer=STMicroelectronics, Datasheet Link=https://www.st.com/resource/en/datasheet/usblc6-2.pdf, Manufacturer Part Number=USBLC6-2SC6
U4: "TPS65217 Single-Chip PMIC for Battery-Powered Systems", Manufacturer="Texas Instruments", Datasheet Link=https://www.ti.com/lit/ds/symlink/tps65217.pdf, Manufacturer Part Number=TPS65217CRSLR
U5 U6 U7: library part CMP-04918-000032-1, "IC REG BUCK ADJ 3A TSOT23-6", Manufacturer="Texas Instruments", Max Junction Temp=+125°C, Max Supply Voltage=28V, Min Supply Voltage=4.5V, Nominal Supply Current=45uA, Output Current=3A, Output Voltage=0.6-26V, Package=DDC0006A, Switching Frequency=400kHz, Temperature="-40°C to +125°C", Temperature Range Low=-40°C, Automotive=No, Category=IC, ComponentLink2Description=Datasheet, ComponentLink2URL=http://www.ti.com/lit/ds/symlink/tps54302.pdf, Device Class L1="Integrated Circuits (ICs)", Device Class L2="Power Management ICs", Device Class L3="Voltage Regulators - Switching", Digikey Description="IC REG BUCK ADJ 3A TSOT23-6", Height=1.1mm, Ipc Land Pattern Name=SOT95P280X110-6, Lead Free=Yes, Manufacturer Part Number=TPS54302DDCR, Max Duty Cycle=100%, Number Of Outputs=1, Octopart=https://octopart.com/tps54302ddcr-texas+instruments-74209025, Output Type=AdjustableProgrammable, RoHS=TRUE, Standoff Height=0mm, Switching Topology=Buck, Temperature Range High=+125°C
U8: "ARM-ASeries 1GHz NFBGA-324 Microcontrollers (MCU/MPU/SOC) ROHS", Manufacturer="Texas Instruments", Datasheet Link=https://www.ti.com/lit/ds/symlink/am3358.pdf, Manufacturer Part Number=AM3358BZCZ100
U9: library part CMP-0859-00290-4, "IC BUFF/DVR NON-INVERT SC70-5", Case/Package=SC, High Level Output Current=32mA, Max Operating Temperature=125°C, Max Supply Voltage=5.5V, Min Operating Temperature=-40°C, Min Supply Voltage=1.65V, Nominal Supply Current=40mA, Package Quantity=1, Quiescent Current=10uA, Contact Plating=Gold, Lead Free="Lead Free", Logic Function=Buffer, Low Level Output Current=32mA, Mount="Surface Mount", Number of Bits=1, Number of Bits per Element=1, Number of Channels=1, Number of Circuits=1, Number of Elements=1, Number of Gates=1, Number of Input Lines=1, Number of Inputs=1, Number of Output Lines=1, Number Of Outputs=1, Number of Pins=5, Packaging="Tape and Reel", Polarity=Non-Inverting, Propagation Delay=8.3ns, Radiation Hardening=No, REACH SVHC="No SVHC", Termination=SMD/SMT, Turn-On Delay Time=8.3ns
U10: "4Gbit SDRAM DDR3L 933MHz FBGA-96(7.5x13.3) DDR SDRAM ROHS", Datasheet Link=https://download.semiconductor.samsung.com/resources/data-sheet/DS_K4B4G1646E_BY_M_Rev1_11-0.pdf, Manufacturer Part Number=K4B4G1646E-BYMA, Mnufacturer=Samsung
U11: "4GB 300/19 MB/s eMMC 5.1 FBGA-153(10x11) eMMC ROHS", Manufacturer=Samsung, Datasheet Link=https://www.lcsc.com/datasheet/lcsc_datasheet_2410121848_Samsung-KLM4G1FETE-B041_C500273.pdf, Manufacturer Part Number=KLM4G1FETE-B041
U12: library part CMP-0859-00246-4, "IC BUFFER INVERT 5.5V SC70-5", Ambient Temperature Range High=+125°C, Ambient Temperature Range Low=-40°C, Manufacturer="Texas Instruments", Max Junction Temp=+150°C, Max Supply Voltage=5.5V, Min Supply Voltage=1.65V, Nominal Supply Current=10uA, Package=DCK0005A, Temperature="-40°C to +125°C", Automotive=No, Category=IC, ComponentLink2Description=Datasheet, ComponentLink2URL=http://www.ti.com/lit/ds/symlink/sn74lvc1g06.pdf, Device Class L1="Integrated Circuits (ICs)", Device Class L2="Logic ICs", Device Class L3=Buffers, Digikey Description="IC BUFFER INVERT 5.5V SC70-5", Height=1.1mm, Lead Free=Yes, Logic Function Desc=Inverting, Manufacturer Part Number=SN74LVC1G06DCKR, Mouser Description="Buffers & Line Drivers Single Invert w/OD", Number of Circuits=1, Number of Inputs=1, Number Of Outputs=1, Octopart=https://octopart.com/sn74lvc1g06dckr-texas+instruments-465505, Propagation Delay=3.5ns, RoHS=TRUE, Standoff Height=0mm, Temperature Range High=+125°C, Temperature Range Low=-40°C
U13: library part CMP-0186-00334-2, "IC TRANSCEIVER FULL 4/4 32QFN", Case/Package=QFN, Max Operating Temperature=85°C, Max Power Dissipation=176mW, Max Supply Current=24.1mA, Max Supply Voltage=3.6V, Min Operating Temperature=0°C, Min Supply Voltage=1.62V, Package Quantity=4000, Data Rate=100Mbps, Height=0.95mm, Lead Free="Lead Free", Length=5.1mm, Number of Channels=1, Number of LEDs=4, Number of Pins=32, Number of Transceivers=1, Packaging="Tape and Reel", Simplex/Duplex="Full Duplex", Width=5.1mm
U14: library part CMP-0859-00043-4, "IC GATE AND 1CH 2-INP SOT23-5", Ambient Temperature Range High=+125°C, Ambient Temperature Range Low=-55°C, Manufacturer="Texas Instruments", Max Junction Temp=+150°C, Max Supply Voltage=5.5V, Min Supply Voltage=2V, Nominal Supply Current=1uA, Package=DBV0005A, Temperature="-55°C to +125°C", Automotive=No, Category=IC, ComponentLink2Description=Datasheet, ComponentLink2URL=http://www.ti.com/lit/ds/symlink/sn74ahc1g08.pdf, Device Class L1="Integrated Circuits (ICs)", Device Class L2="Logic ICs", Device Class L3="Logic Gates", Digikey Description="IC GATE AND 1CH 2-INP SOT23-5", Height=1.45mm, Lead Free=Yes, Logic Function Desc=Non-Inverting, Manufacturer Part Number=SN74AHC1G08DBVR, Mouser Description="AND Gate 1-Element 2-IN CMOS 5-Pin SOT-23 AND Gate 1-Element 2-IN CMOS 5-Pin SOT-23 AND Gate 1-Element 2-IN CMOS 5-Pi...", Number of Circuits=1, Number of Inputs=2, Number Of Outputs=1, Octopart=https://octopart.com/sn74ahc1g08dbvr-texas+instruments-464404, Propagation Delay=5.8ns, RoHS=TRUE, Standoff Height=0mm, Temperature Range High=+125°C, Temperature Range Low=-55°C
U15: "Conn IC Socket SD Memory Cd Micro 1.10mm 8Cir Norm Mnt SMT Push-Push LF", Manufacturer=Molex, Manufacturer Part Number=502570-0893, Datasheet Link=https://www.molex.com/en-us/products/part-detail/5025700893
U16: "USB 2.0 4-PORT HuB CONTROLlER", Manufacturer="Terminus Tech", Datasheet Link=https://taoic.oss-cn-hangzhou.aliyuncs.com/7545/product/johnma_1627012225000.pdf, Manufacturer Part Number=FE1.1S-BQFN24B
U17: library part CMP-2000-07277-1, "Current-Limited, Power-Distribution Switch, 2.7 to 5.5 V, -40 to 85 degC, 5-Pin SOT-23 (DBV), Green (RoHS & no Sb/Br), Tape and Reel", Current Limit=1A, Manufacturer=TexasInstruments, Maximum Operating Temperature=+85C, Minimum Operating Temperature=-40C, On Resistance - Max=70mOhms, Operating Supply Voltage=2.7Vto5.5V, Output Current=500mA, Package / Case=SOT-23-5, Package Description="5-Pin Small Outline Transistor, Body 2.9 x 1.6 mm, Pitch 0.95 mm", Package Reference=DBV5, Package Version="4073253-4/N, 12/2014", Supply Voltage - Max=5.5V, Supply Voltage - Min=2.7V, Brand=TexasInstruments, Datasheet URL=http://www.ti.com/general/docs/lit/getliterature.tsp?genericPartNumber=TPS2051B&fileType=pdf, Datasheet Version="Rev. L, 06/2011", Development Kit=TPS2051BEVM, Factory Pack Quantity=3000, Manufacturer URL=http://www.ti.com/, Mounting Style=SMD/SMT, Mounting Technology=SurfaceMount, Number Of Outputs=1Output, Package URL=http://www.ti.com/lit/ml/mpds018l/mpds018l.pdf, Packaging=Reel, Product=USBCurrentLimitedPowerSwitches, Product Category=PowerSwitchICs-PowerDistribution, RoHS=Details, Series=TPS2051B, Type=HighSide
U19: "LTE Cat 1 module", Manufacturer="SIMCom Wireless Solutions", Manufacturer Part Number=A7670E-LASE, ComponentLink1Description="Datasheet Link", ComponentLink1URL=https://nostris.ee/pdf/A7670%20Series%20Hardware%20Design_V1.00.pdf, Datasheet Link=https://nostris.ee/pdf/A7670%20Series%20Hardware%20Design_V1.00.pdf
U20 U21 U22 U26: "N-Channel 30 V 4A (Ta) 1.4W (Ta) Surface Mount SOT-23-3", Manufacturer="Alpha & Omega Semicon", ComponentLink1Description="Datasheet Link", ComponentLink1URL=https://www.lcsc.com/datasheet/lcsc_datasheet_2410121835_Alpha---Omega-Semicon-AO3402_C14385.pdf, Manufacturer Part Number=AO3402
U23: "RF Receiver BeiDou, Galileo, GLONASS, GNSS, GPS -167dBm 921.6kbps", Manufacturer=u-blox, Manufacturer Part Number=NEO-F9P-15B, Datasheet Link=https://content.u-blox.com/sites/default/files/documents/NEO-F9P-15B_DataSheet_UBX-22021920.pdf
U24: "Wi-Fi and Bluetooth 802.11a/b/g/n/ac", Manufacturer="AMPAK Tech", ComponentLink1Description="Datasheet Link", ComponentLink1URL=https://files.pine64.org/doc/datasheet/PinebookPro/AP6256%20datasheet_V1.7_12282018.pdf, Manufacturer Part Number=AP6256
U25: "32Kbit 400kHz I2C SOT-23-5 EEPROM ROHS", Manufacturer="Microchip Tech", ComponentLink1Description="Datasheet Link", ComponentLink1URL=https://ww1.microchip.com/downloads/aemDocuments/documents/MPD/ProductDocuments/DataSheets/24AA32A-24LC32A-32-Kbit-I2C-Serial-EEPROM-DS20001713.pdf, Manufacturer Part Number=24LC32AT-I/OT
Y1: library part X322524MSB4SI, "24MHz Surface Mount Crystal 20pF ±10ppm ±20ppm SMD3225-4P Crystals ROHS", Manufacturer="YXC Crystal Oscillators", Datasheet Link=https://www.lcsc.com/datasheet/lcsc_datasheet_2411121006_YXC-Crystal-Oscillators-X322524MSB4SI_C15643.pdf, Manufacturer Part Number=X322524MSB4SI
Y2: library part XKXGI-SUA-32.768K, "32.768kHz Surface Mount Crystal 12.5pF ±20ppm ±30ppm SMD3215-2P Crystals ROHS", Manufacturer="YXC Crystal Oscillators", Datasheet Link=https://www.lcsc.com/datasheet/lcsc_datasheet_2210261730_YXC-Crystal-Oscillators-XKXGI-SUA-32-768K_C5213671.pdf, Manufacturer Part Number=XKXGI-SUA-32.768K
Y3: library part X322525MSB4SI, "25MHz Surface Mount Crystal 20pF ±10ppm ±20ppm SMD3225-4P Crystals ROHS", Manufacturer="YXC Crystal Oscillators", ComponentLink1Description="Datasheet Link", ComponentLink1URL=https://www.lcsc.com/datasheet/lcsc_datasheet_2411121006_YXC-Crystal-Oscillators-X322525MSB4SI_C13740.pdf, Manufacturer Part Number=X322525MSB4SI
Y4: library part X322512MSB4SI, "12MHz Surface Mount Crystal 20pF ±10ppm ±20ppm SMD3225-4P Crystals ROHS", Manufacturer="YXC Crystal Oscillators", Datasheet Link=https://www.lcsc.com/datasheet/lcsc_datasheet_2411121006_YXC-Crystal-Oscillators-X322524MSB4SI_C15643.pdf, Manufacturer Part Number=X322512MSB4SI
Y5: library part E3SB37E0X0004E, "37.4MHz 16pF ±10ppm ±10ppm SMD3225-4P Crystals ROHS", Manufacturer="Hosonic Elec", ComponentLink1Description="Datasheet Link", ComponentLink1URL=https://www.lcsc.com/datasheet/lcsc_datasheet_2410121523_Hosonic-Elec-E3SB37E0X0004E_C2687892.pdf, Manufacturer Part Number=E3SB37E0X0004E
Y6: library part YSO120TK, "1.8V~3.3V ±10ppm ±20ppm CMOS 32.768kHz SMD3225-4P Crystal Oscillators ROHS", Manufacturer="YXC Crystal Oscillators", Manufacturer Part Number=OK2EL89CJI-111YLC-32.768K, ComponentLink1Description="Datasheet Link", ComponentLink1URL=https://www.lcsc.com/datasheet/lcsc_datasheet_2407310922_YXC-Crystal-Oscillators-OK2EL89CJI-111YLC-32-768K_C5280579.pdf

## Via types
v1: diameter 0.5, hole 0.2, Top Layer to Bottom Layer, tented both sides, 532 vias
v2: diameter 0.457, hole 0.203, Top Layer to Bottom Layer, tented both sides, 414 vias
v3: diameter 0.5, hole 0.2, Top Layer to Bottom Layer, 233 vias
v4: diameter 0.7, hole 0.3, Top Layer to Bottom Layer, 32 vias
v5: diameter 0.457, hole 0.2, Top Layer to Bottom Layer, tented both sides, 30 vias
v6: diameter 0.7, hole 0.3, Top Layer to Bottom Layer, tented both sides, 2 vias

## Nets (pads, with @x,y where several pads share a name; then routed paths per layer and width w, separated by ;. In a path a pad name is that pad's centre, name@x,y a point inside that pad or via, vN(x,y) a via of type N, cw(c..) or ccw(c..) an arc to the next point about the centre after c; other vN are vias at no path point)
3V3: C30.1 C31.1 C105.1 C106.1 C107.1 C108.1 C109.1 C110.1 C112.1 C113.1 C114.1 C124.1 C128.1 C129.1 C133.1 C146.1 C147.1 C148.1 C152.1 C153.1 C154.1 C155.1 C160.1 C165.1 FB1.1 J7.02 J7.08 J8.05 L5.2 LED6.1 R7.2 R52.2 R53.2 R54.2 R55.2 R56.2 R57.2 R58.2 R59.2 R60.2 R61.2 R62.2 R73.2 R74.2 R75.2 R82.2 R83.2 R84.2 R85.2 R86.2 R87.2 R88.2 R89.2 R94.1 R111.2 R112.2 R113.2 R114.2 R115.2 R116.2 R162.2 R163.2 R166.2 R167.2 U11.C6 U11.E6 U11.F5 U11.J10 U11.K9 U11.M4 U11.N4 U11.P3 U11.P5 U12.5 U13.12 U14.5 U15.4 U16.20 U23.7 U23.22 U23.23 U24.9 U24.22 U25.4 Y6.4 | length 69.2
  Top Layer w0.203: U16.20@45.59,54.238 U16.20@45.619,54.266 ; C133.1@47.446,54.266 47.475,54.295 47.523,54.248 ; v1@62.648,75.698 62.729,75.779 62.729,76.429 R75.2@62.75,76.45 ; v2(102.5,60.475) 102.525,60.475 102.946,60.054 R62.2@102.971,60.054 ; v2(103.475,61.875) 103.499,61.851 103.499,61.551 R61.2@103.993,61.057 ; v2(104.625,62.6) 104.625,62.575 105.021,62.179 R55.2@105.021,62.154 ; U11.C6@107.864,57.318 U11.C6@107.881,57.301 ; U11.F5@108.553,55.925 108.558,55.92 U11.F5@108.62,55.92 ; U11.E6@108.555,56.627 U11.E6@108.575,56.607 ; U11.E6@108.571,56.611 U11.E6@108.595,56.611 ; U11.M4@110.339,53.429 U11.M4@110.339,53.452 ; U11.N4@110.668,53.1 U11.N4@110.7,53.1 ; U11.N4@110.675,53.025 110.693,53.007 U11.P3@110.693,52.368 110.693,52.345 110.9,52.137 v2@110.9,51.875 ; U11.N4@110.799,53.069 U11.P5@111.264,53.069 ; v2@111.199,56.128 111.199,56.201 v2(111.15,56.25) 111.199,56.299 v2@111.199,56.386 ; U11.K9@111.4,55.904 U11.K9@111.4,55.927
  Top Layer w0.254: U13.12@56.824,85.113 v1@57.938,85.113 ; U11.C6@107.881,57.301 108.13,57.301 v2@108.306,57.125 ; v2@108.375,57.056 108.555,56.876 U11.E6@108.555,56.627 ; U11.E6@108.595,56.611 v2@108.931,56.275 ; U11.F5@108.62,55.92 v2(108.975,56.275) ; v2@110.075,53.716 U11.M4@110.339,53.452 ; U11.M4@110.339,53.429 U11.N4@110.668,53.1 ; v2@111.199,56.128 U11.K9@111.4,55.927 ; v2@111.199,56.386 U11.J10@111.4,56.587
  Top Layer w0.305: R73.2@64.525,85.675 64.623,85.773 64.799,85.773 64.826,85.8 v1(66.8,85.8) ; R74.2@66.8,85.1 v1@66.8,85.675
  Top Layer w0.381: C146.1@133.861,32.313 134.337,32.313 v2(134.35,32.3)
  Top Layer w0.406: R89.2@45.5,50.425 v1(45.5,49.8) v1@45.525,49.775 ; U16.20@45.619,54.266 C133.1@47.446,54.266 ; 47.523,54.248 48.073,54.248 v1(48.075,54.25) ; v1@50.798,57.627 R94.1@50.798,58.178 ; C128.1@60.4,26.683 v2(60.4,27.275) ; C128.1@60.44,26.625 60.483,26.582 60.483,25.599 C129.1@60.657,25.425 ; U14.5@64.778,54.072 64.875,53.975 U14.5@65.125,53.975 ; v1(76.075,66.875) R114.2@76.075,67.475 ; R113.2@77.375,67.525 77.432,67.468 77.432,66.868 v1(77.45,66.85) ; R111.2@78.697,67.475 78.682,67.46 78.682,66.843 v1(78.7,66.825) ; C154.1@81.923,67.078 C154.1@81.932,67.068 ; 82.33,67.186 U24.22@83.582,67.186 ; U23.7@131.476,32.326 131.491,32.311 C146.1@133.739,32.311 ; v1@151,59.625 151,58.851 LED6.1@151.025,58.826
  Top Layer w0.457: v1@57.938,85.113 v1@57.95,85.125 ; C153.1@86.55,78.8 C152.1@86.55,79.88 ; U24.9@86.575,77.675 C153.1@86.575,78.755
  Bottom Layer w0.203: v2@108.425,57.225 108.442,57.208 v2@108.458,57.208 ; C109.1@108.761,57.511 C109.1@108.786,57.511 ; C107.1@109.589,53.214 C107.1@109.589,53.364 ; v2(110.05,53.825) v2@110.1,53.825 ; v2(110.85,51.825) v2@110.899,51.776 ; C106.1@110.875,56.594 C106.1@110.875,56.675 ; v2(111.15,56.25) v2@111.15,56.319
  Bottom Layer w0.305: v1(60.775,37.6) 60.738,37.637 60.738,38.462 60.726,38.474 60.726,38.726 63.3,41.3 65.011,41.3 65.413,41.701 65.413,41.963 v1(65.45,42) ; U25.4@65.425,44.075 65.425,43.875 66.092,43.208 C160.1@66.092,42.7 ; v1@65.5,42.025 65.512,42.037 65.914,42.037 66.092,42.216 66.092,42.562 C160.1@66.23,42.7 ; v1@68.4,37.325 R88.2@68.4,37.898 ; v1@69.775,37.15 69.775,37.875 R84.2@69.8,37.9 ; v1(71.1,37.275) 71.137,37.312 71.137,37.872 R85.2@71.2,37.934 ; v1(72.625,37.3) R86.2@72.625,37.883 ; v1@73.886,37.236 R87.2@73.886,37.834 ; v1@75.236,37.186 75.236,37.859 R82.2@75.25,37.873 ; R83.2@76.536,37.909 76.547,37.899 v1@76.547,37.247 ; Y6.4@87.422,67.47 Y6.4@87.577,67.625 ; v2@95.8,57.775 95.812,57.763 95.812,57.038 R57.2@95.825,57.025 ; v2@102.475,60.491 102.529,60.545 102.529,60.588 102.755,60.814 103.049,60.814 R59.2@103.146,60.912 ; v2@103.475,61.85 103.479,61.846 103.904,61.846 104.424,61.326 104.424,61.009 104.521,60.912 R58.2@104.546,60.912 ; R56.2@106.181,60.859 106.193,60.871 106.671,60.871 106.713,60.913 107.387,60.913 R53.2@107.4,60.925 ; C110.1@107.477,54.973 107.823,54.973 C105.1@108.525,55.675 108.525,55.759 108.946,56.18 108.946,56.246 v2(108.975,56.275) ; v2@108.458,57.208 C109.1@108.761,57.511 ; v2(108.725,61.4) 108.737,61.387 108.737,60.888 R54.2@108.75,60.875 ; C107.1@109.589,53.364 v2(110.05,53.825) ; C106.1@110.875,56.594 v2@111.15,56.319 ; v2@110.899,51.776 110.899,51.426 C108.1@110.925,51.4 ; v2(114.75,47.725) 114.756,47.731 114.756,48.331 R52.2@114.762,48.338
  Bottom Layer w0.381: R60.2@95.759,58.223 95.767,58.223 95.8,58.19 v2(95.8,57.725)
  Bottom Layer w0.4: v2(100.825,33.075) C165.1@101.361,32.539
  Bottom Layer w0.406: v2(60.4,27.275) U15.4@60.4,27.919 ; C160.1@66.225,42.695 C160.1@66.23,42.7 ; v1(77.45,66.85) 77.45,66.875 77.48,66.905 77.48,67.428 77.501,67.45 R112.2@77.55,67.45 ; v1(78.7,66.825) 78.718,66.843 78.718,67.468 R116.2@78.75,67.5 ; v1(80.05,66.875) R115.2@80.05,67.486 ; v2(80.725,31.225) 80.739,31.225 80.767,31.197 81.303,31.197 81.35,31.15 R162.2@81.35,31.125 R163.2@81.35,32.2 ; C165.1@101.239,32.639 101.362,32.639 101.54,32.462 101.563,32.462 J8.05@102.289,31.736 ; v2(103.525,37.85) 103.539,37.85 103.881,37.508 R166.2@103.892,37.508 ; R167.2@112.319,29.106 v2@112.59,28.835 ; R52.2@114.761,48.26 116.09,48.26 C112.1@116.175,48.175 ; C112.1@116.236,48.28 116.266,48.28 117.396,47.15 119.962,47.15 120.425,47.613 U12.5@120.425,47.95
  Bottom Layer w0.457: v1@85.675,67.45 86.255,67.45 C155.1@86.275,67.47 ; C155.1@86.33,67.47 Y6.4@87.422,67.47
  other v1: 69.775,37.275 68.375,37.3 73.9,37.3 75.25,37.3 76.55,37.3 64.4,53.35 63.9,53.925 50.8,57.625 151,59.725 81.55,66.425 82.35,66.425 85.65,67.45 52.3,71 53,71 53.8,71 54.6,71 55.5,71 55.1,71.8 62.675,75.725 85.75,80.025 85.725,80.875 86.575,80.95 58.525,82.95 57.85,82.975 57.975,85.1 57.325,88.25 56.65,88.275
  other v2: 114.132,26.694 114.132,27.644 115.932,27.694 112.6,28.825 108.375,57.125 106.7,60.9
3V3_DC_BOOT: C28.1 U6.6 | length 5.7
  Top Layer w0.254: U6.6@47.579,69.173 47.579,67.695 47.728,67.546 51.012,67.546 C28.1@51.512,67.046
3V3_DC_FB: R7.1 R8.2 U6.4 | length 3.3
  Top Layer w0.254: U6.4@49.479,69.173 49.504,69.198 R8.2@49.504,72.417
3V3_DC_SW: C28.2 L5.1 U6.2 | length 0.6
  Top Layer w0.254: C28.2@51.501,65.942 51.506,65.937 51.506,65.327 v1(51.512,65.321)
  other v1: 52.9,64.9 53.5,64.9 48.225,65 48.825,65 48.225,65.6 48.825,65.6 52.9,65.6 53.5,65.6
3V7: C34.1 C139.1 C140.1 L6.2 R9.2 R98.1 R99.1 U19.55 U19.56 U19.57 | length 5.9
  Top Layer w0.406: L6.2@136.475,62.2 136.85,61.825 R9.2@136.85,58.875
  Bottom Layer w0.406: v1(139.525,72.375) 139.543,72.393 140.424,72.393 R99.1@140.475,72.444 ; R99.1@140.475,72.425 R98.1@140.475,73.85
3V7_DC_BOOT: C32.1 U7.6 | length 1.9
  Top Layer w0.169: U7.6@129.2,58.15 U7.6@129.335,58.285 ; C32.1@131,58.235 C32.1@131,58.325
  Top Layer w0.406: U7.6@129.335,58.285 C32.1@131,58.285
3V7_DC_FB: R9.1 R11.2 U7.4 | length 11.9
  Top Layer w0.406: U7.4@127.25,58.25 127.25,57.125 127.725,56.65 135.425,56.65 135.55,56.775 R11.2@135.55,57.475 R9.1@135.55,58.975
3V7_DC_SW: C32.2 L6.1 U7.2 | length 4.2
  Top Layer w0.169: 131.025,61.61 131.25,61.835 v1(131.25,61.9) 132.375,61.9 L6.1@132.675,62.2
  Top Layer w0.406: C32.2@131.025,59.305 131.025,61.61